# Altium PCB PCB1.PcbDoc
Units mm, origin at the board's own origin, x right, y up, seen from the top; angles counter-clockwise.
Board outline 100.25 x 100.2 mm, 2 copper layers (Top Layer, Bottom Layer); 47 components, 53 nets, 179 pads, 20 vias.
Unrouted connection lines stored in the file: 2.
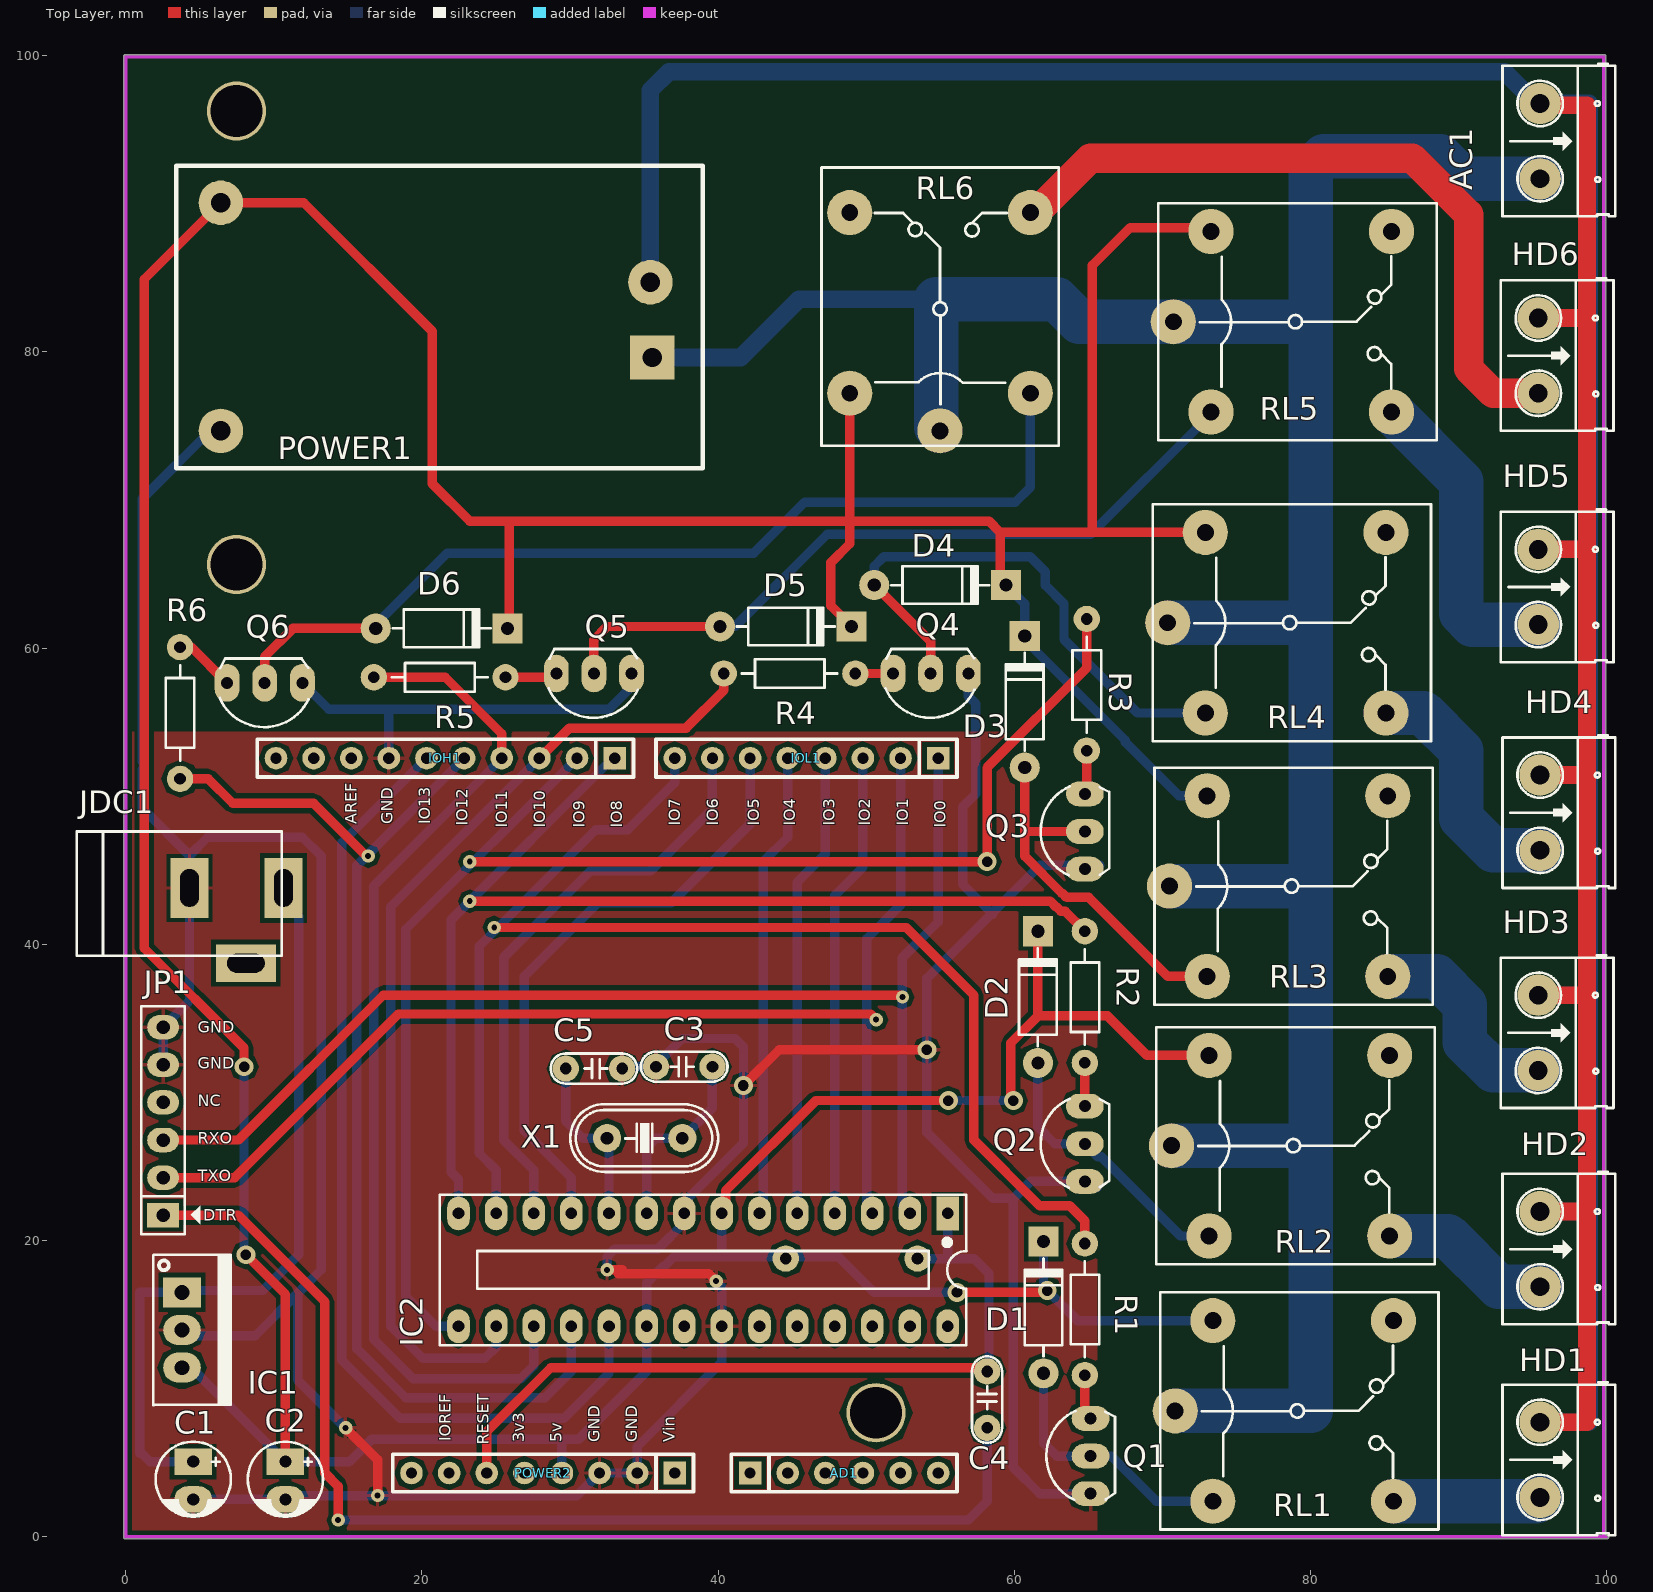
[diagram p0: Top Layer view]
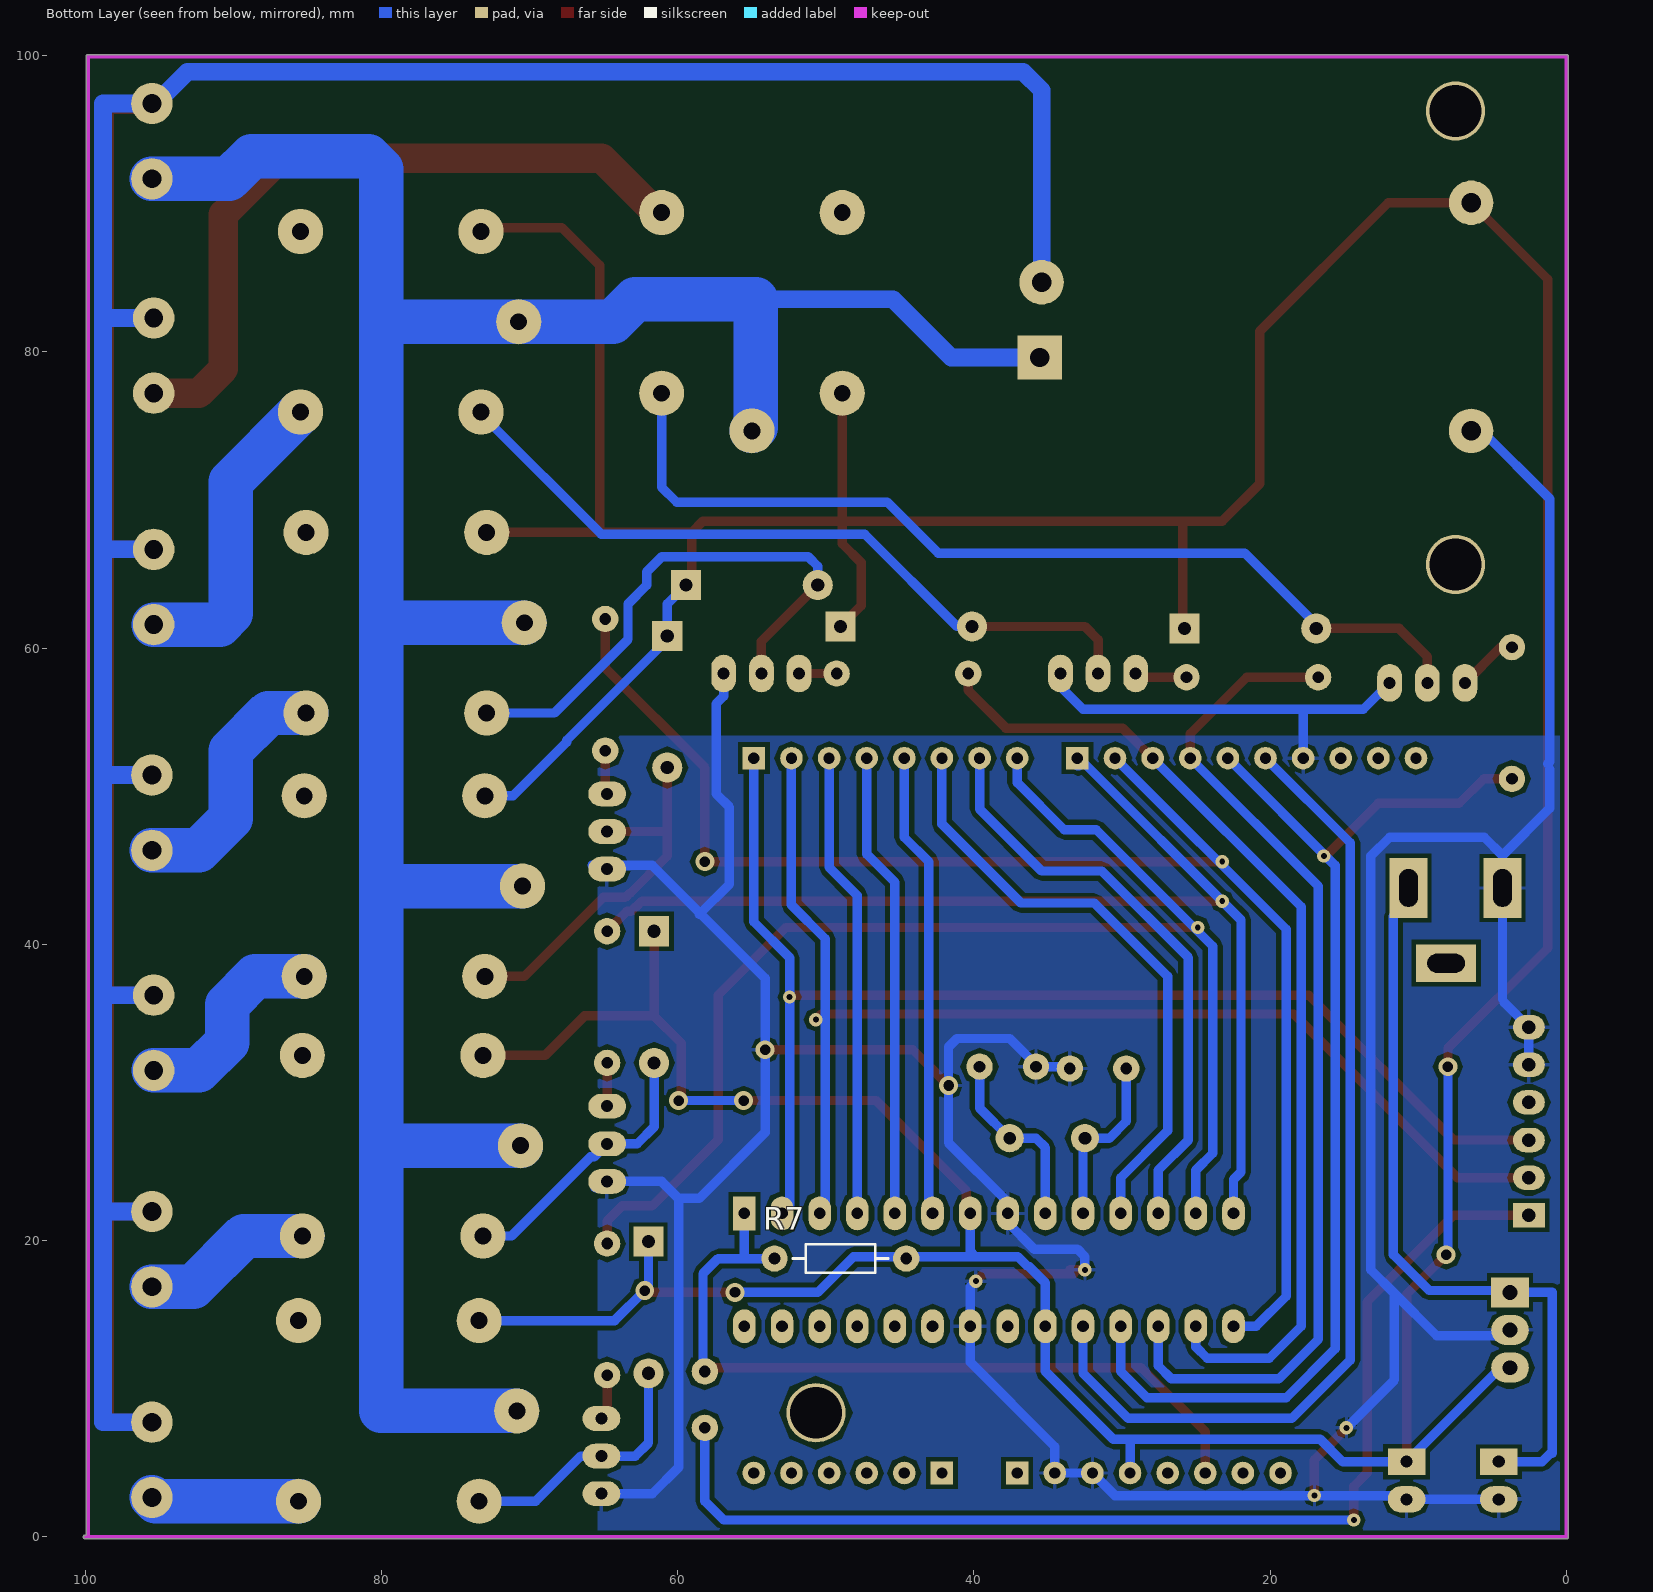
[diagram p1: Bottom Layer view, seen from below]
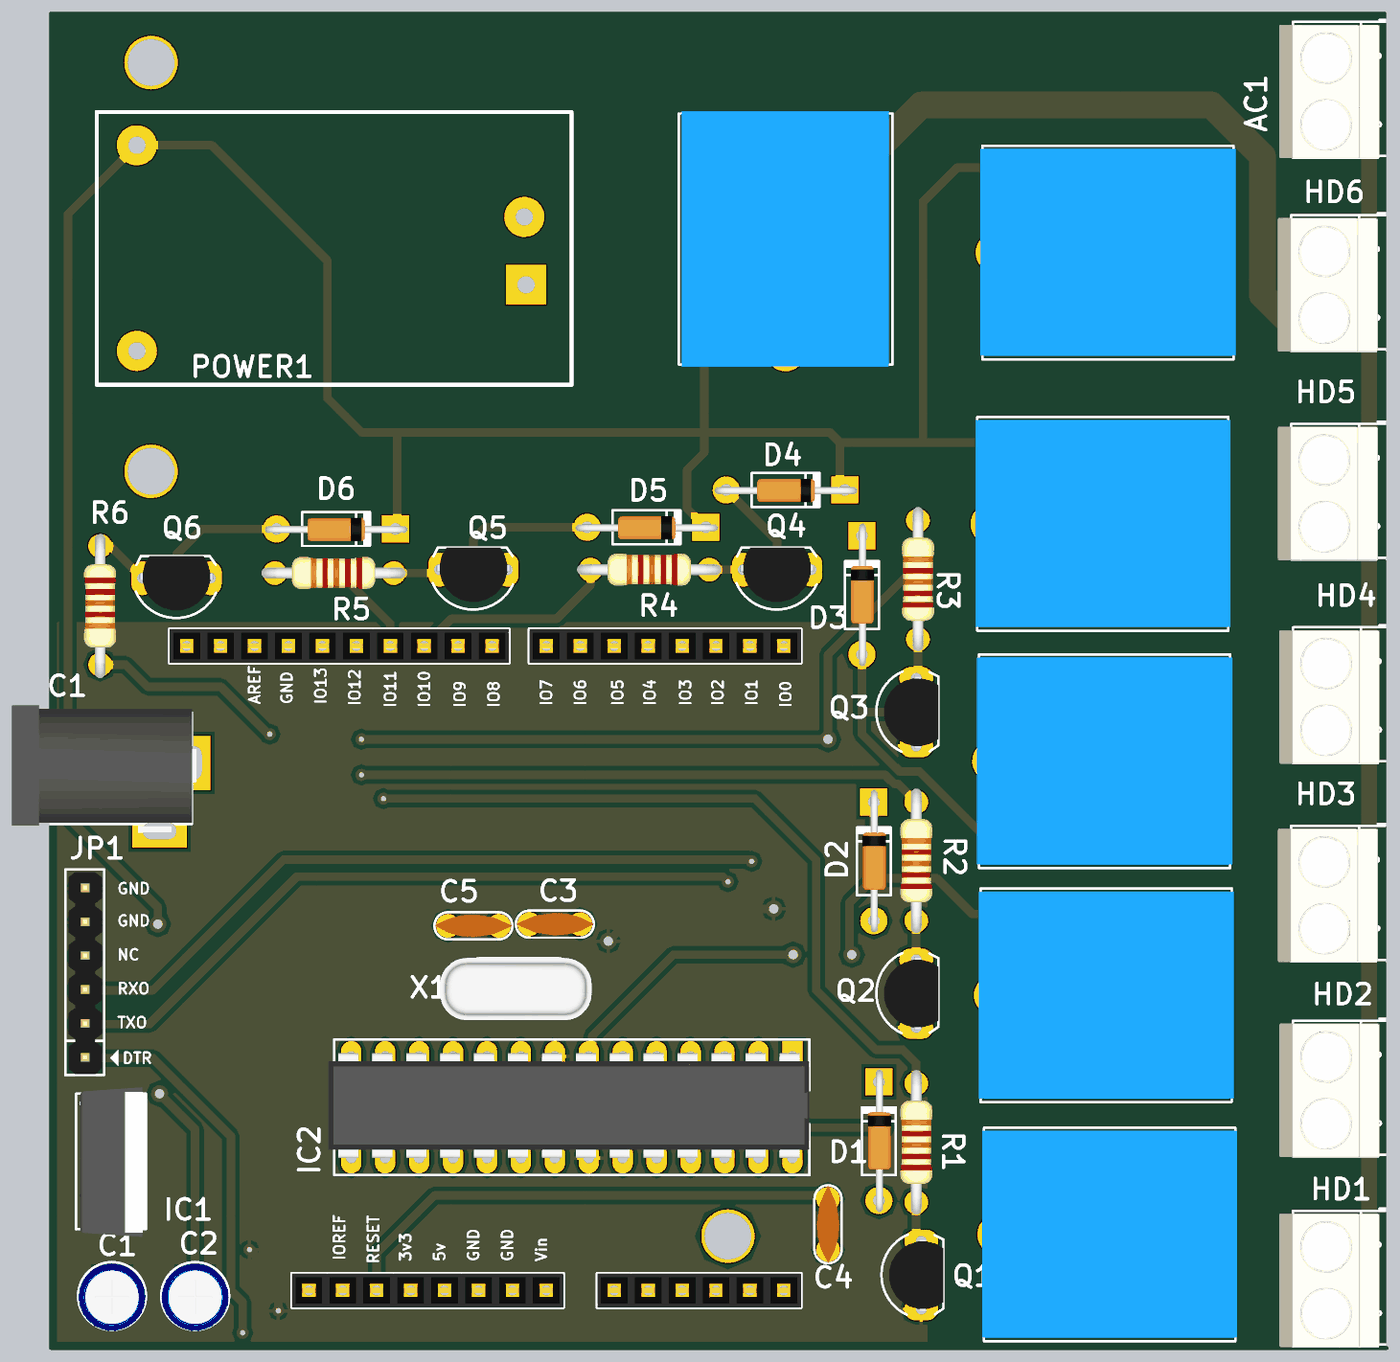
[diagram p2: 3D render of the assembled board from above, using the file's embedded part models]

## Layer stack, top to bottom
Top Solder: solder mask 0.0102, Solder Resist, Dk 3.5
Top Layer: signal copper 0.0356
Dielectric 1: dielectric 0.32, FR-4, Dk 4.8
Bottom Layer: signal copper 0.0356
Bottom Solder: solder mask 0.0102, Solder Resist, Dk 3.5

## Board outline
0,-0.127 cw(c0,0) -0.127,0 -0.127,99.949 cw(c0,99.949) 0,100.076 99.822,100.076 cw(c99.822,99.949) 99.949,99.949 99.949,0.127 100,0.127 cw(c100,0) 100.127,0 cw(c100,0) 100,-0.127

## Design rules (kind name [scope] priority, off if disabled: settings)
Clearance [All] p1: gap=0.3
PolygonConnect [All] p1: connectstyle=Relief reliefconductorwidth=0.254 reliefentries=4 polygonreliefangle="90 Angle" airgapwidth=0.254
RoutingVias [All] p1: holewidth=0.711 width=1.27 viastyle="Through Hole" minholewidth=0.711 minwidth=1.27 maxholewidth=0.711 maxwidth=1.27
SolderMaskExpansion [All] p1: expansion=0.102
Width [All] p1: maxlimit=3 minlimit=0.635 preferedwidth=0.762
30 further rules are at their usual default settings.

## Components (designator, comment, footprint, x,y, rotation, side; value= is the part's Value field where it differs from the comment)
AC1 "Header 2_1" HED2 95.504,96.774 r270 top
AD1 "AD" "Header 6x1 8.5mm" 42.164,4.318 r0 top locked
C1 "10uF" CP1/2 4.572,5.08 r270 top
C2 "100uF" CP1/2 10.795,5.08 r270 top
C3 "22p" CN1.5 35.814,31.75 r0 top
C4 "103" CN1.5 58.166,11.176 r270 top
C5 "22p" CN1.5 33.528,31.623 r180 top
D1 "1N4007" D1A 61.976,11.049 r270 top
D2 "1N4007" D1A 61.595,32.004 r270 top
D3 "1N4007" D1A 60.706,51.943 r270 top
D4 "1N4007" D1A 50.546,64.262 r180 top
D5 "1N4007" D1A 40.132,61.468 r180 top
D6 "1N4007" D1A 16.891,61.341 r180 top
HD1 "Header 2" HED2 95.504,7.747 r270 top
HD2 "Header 2" HED2 95.504,21.971 r270 top
HD3 "Header 2" HED2 95.377,36.576 r270 top
HD4 "Header 2" HED2 95.504,51.435 r270 top
HD5 "Header 2" HED2 95.377,66.675 r270 top
HD6 "Header 2" HED2 95.377,82.296 r270 top
IC1 "LM7805" QTO-220 3.81,16.51 r270 top
IC2 "ATmega8-L" DIP28/W0.3 55.499,21.844 r180 top
IOH1 "IOH" "Header 10x1 8.5mm" 33.02,52.578 r180 top locked
IOL1 "IOL" "Header 8x1 8.5mm" 54.864,52.578 r180 top locked
JDC1 "Jac DC" DC-IN 7.493,41.275 r0 top
JP1 "JP6 PIN" JP6 2.54,21.717 r90 top
POWER1 "HLK-PM01 5V" "HK LINK" 35.433,74.676 r180 top
POWER2 "POWER_UNO" "Header 8x1 8.5mm" 37.084,4.318 r180 top
Q1 "C1815" QTO-92 65.151,5.461 r90 top
Q2 "C1815" QTO-92 64.77,26.543 r90 top
Q3 "C1815" QTO-92 64.77,47.625 r90 top
Q4 "C1815" QTO-92 54.356,58.293 r180 top
Q5 "C1815" QTO-92 31.623,58.293 r180 top
Q6 "C1815" QTO-92 9.398,57.658 r180 top
R1 "1.5k" R1/4W 64.77,19.812 r270 top
R2 "1.5k" R1/4W 64.77,40.894 r270 top
R3 "1.5k" R1/4W 64.897,61.976 r270 top
R4 "1.5k" R1/4W 40.386,58.293 r0 top
R5 "1.5k" R1/4W 16.764,58.039 r0 top
R6 "1.5k" R1/4W 3.683,51.181 r90 top
R7 "1.5k" R1/4W 53.467,18.796 r180 bottom
RL1 "Relay 10A/12V" RL_SPDT_10A 70.866,8.509 r0 top
RL2 "Relay 10A/12V" RL_SPDT_10A 70.612,26.416 r0 top
RL3 "Relay 10A/12V" RL_SPDT_10A 70.485,43.942 r0 top
RL4 "Relay 10A/12V" RL_SPDT_10A 70.358,61.722 r0 top
RL5 "Relay 10A/12V" RL_SPDT_10A 70.739,82.042 r0 top
RL6 "Relay 10A/12V" RL_SPDT_10A 54.991,74.676 r90 top
X1 "16Mhz" XT2 35.052,26.924 r0 top

## Footprints (in the part's own frame and the unit in brackets; to place one, negate y for a bottom-side part, rotate by r counter-clockwise, add the part's x,y. Pads: shape width x height; smd on the part's side, far side on the other; paste and mask are expansions set on the pad)
CN1.5 [mil]
  round 70 hole 31: 1(0,0) 2(150,0)
  silkscreen extent -40,-40 190,40, body extent -40,-33 190,33, height 235
CP1/2 [mil] "Tu hoa < 22uF/16>50V"
  rect 70x100 hole 32: 1(0,0)
  oval 70x100 hole 32: 2(100,0)
  silkscreen extent -53,-100 146,100, body extent -49,-99 149,99, height 287
D1A [mil] "Diode 1A, W 100mil, L 350mil"
  round 80 hole 35: 1(0,0)
  rect 80x80 hole 35: 2(-350,0)
  silkscreen extent -305,-50 -45,50, body extent -386,-33 34,36, height 84
DC-IN [mil] "Jac DC input"
  rect 100x160 hole 50 slot 100 at 90 deg: 1(125,100) 2(-125,100)
  rect 160x100 hole 50 slot 100 at 0 deg: 3(25,-100)
  silkscreen extent -425,-80 120,250, body extent -410,-105 134,269, height 434
DIP28/W0.3 [mil] "28 PIN, W 300mil, Pin to pin 100mil"
  rect 60x90 hole 31: 1(0,0)
  oval 60x90 hole 31: 2(100,0) 3(200,0) 4(300,0) 5(400,0) 6(500,0) 7(600,0) 8(700,0) 9(800,0) 10(900,0) 11(1000,0) 12(1100,0) 13(1200,0) 14(1300,0) 15(1300,300) 16(1200,300) 17(1100,300) 18(1000,300) 19(900,300) 20(800,300) 21(700,300) 22(600,300) 23(500,300) 24(400,300) 25(300,300) 26(200,300) 27(100,300) 28(0,300)
  silkscreen extent -50,-50 1350,350, body extent -50,-10 1367,300, height 200
"Header 6x1 8.5mm" [mil] "Stackable 6 pin header"
  rect 60x60 hole 30: 1(0,0)
  round 60 hole 30: 2(100,0) 3(200,0) 4(300,0) 5(400,0) 6(500,0)
  silkscreen extent -50,-50 550,50, body extent -50,-50 550,50, height 335
"Header 8x1 8.5mm" [mil] "Stackable 8 pin header"
  rect 60x60 hole 30: 1(0,0)
  round 60 hole 30: 2(100,0) 3(200,0) 4(300,0) 5(400,0) 6(500,0) 7(600,0) 8(700,0)
  silkscreen extent -50,-50 750,50, body extent -50,-50 750,50, height 335
"Header 10x1 8.5mm" [mil] "Stackable 10 pin header"
  rect 60x60 hole 30: 1(0,0)
  round 60 hole 30: 2(100,0) 3(200,0) 4(300,0) 5(400,0) 6(500,0) 7(600,0) 8(700,0) 9(800,0) 10(900,0)
  silkscreen extent -50,-50 950,50, body extent -50,-50 950,50, height 335
HED2 [mil] "Header 2, 2 pin, hight 300mil, Pin to Pin 200, Colour Green"
  round 110 hole 50: 1(0,0) 2(200,0)
  silkscreen extent -106,-100 300,200, body extent -92,-140 302,155, height 394
"HK LINK" [mm]
  rect 3x3 hole 1.3: 1(-0.127,-4.953)
  round 3 hole 1.3: 2(0,-10.033) 3(29,0) 4(29,-15.4)
  silkscreen extent -3.53,-17.89 32,2.54, body extent -3.81,-18.03 31.88,2.41, height 15
JP6 [mil] "JP6"
  rect 65x85 hole 36: 1(0,0)
  oval 65x85 hole 36: 2(100,0) 3(200,0) 4(300,0) 5(400,0) 6(500,0)
  silkscreen extent -50,-99 556,58, body extent -48,-50 548,48, height 323
QTO-92 [mil] "TO-92"
  oval 66x100 hole 32: 1(-100,0) 2(0,0) 3(100,0)
  silkscreen extent -117,-65 120,118, body extent -109,-66 109,95, height 245
QTO-220 [mil] "TO-220 - 1-2-3"
  rect 80x100 hole 39: 1(0,0)
  oval 80x100 hole 39: 2(100,0) 3(200,0)
  silkscreen extent -100,-76 300,130, body extent -119,-64 322,121, height 755
R1/4W [mil] "R 1/4W, 2 Pin, 350mil"
  round 70 hole 31: 1(0,0) 2(350,0)
  silkscreen extent 48,-38 302,38, body extent -40,-47 386,47, height 111
RL_SPDT_10A [mil] "Relay SPDT, 5 pin, 10A,W 650mil, L 800mil, H 800mil"
  round 120 hole 45: 1(0,0) 2(580,240) 3(580,-240) 4(100,-240) 5(100,240)
  silkscreen extent -40,-315 700,315, body extent -46,-304 706,306, height 602
XT2 [mil] "Footpin for Crystal 2 pin"
  round 75 hole 34: 1(-100,0) 2(100,0)
  silkscreen extent -198,-90 195,90, body extent -233,-93 213,90, height 138

## Part data
AC1: "Header, 2-Pin"
C1 C2: library part CP1, "Cap P  0,1uF < 22uF , 16 - 50V"
C3 C4 C5: library part CN1.5, "Cap np 682pF => 104pF"
D1 D2 D3 D4 D5 D6: library part D1A, "Diode 1A"
HD1 HD2 HD3 HD4 HD5 HD6: library part Hed2, "Header 2 (Green)"
IC1: library part LM78xx, "On ap +, from + 5 to + 24VDC"
IC2: "8-Bit AVR Microcontroller with 8K Bytes of In-System Programmable Flash Memory"
JDC1: library part DCIN, "Jac DC input"
JP1: library part JP6
POWER1: library part "Hi link", "Hi-link HLK-PM01"
Q1 Q2 Q3 Q4 Q5 Q6: "NPN 600mW, ECB"
R1 R2 R3 R4 R5 R6 R7: library part R, "Resistor 1/4W"
RL1 RL2 RL3 RL4 RL5 RL6: library part "Relay 1", "Relay SPDT,10A - 12VDC 5 Pin"
X1: library part XT2, "Crystal For all Crystal 2pin."

## Free pads (board coordinates)
  round 4 hole 3.5: 0(50.673,8.382) 1(7.493,96.266) 2(7.493,65.659)

## Via types
v1: diameter 0.9, hole 0.4, Top Layer to Bottom Layer, tented both sides, 11 vias
v2: diameter 1.27, hole 0.711, Top Layer to Bottom Layer, tented both sides, 9 vias

## Nets (pads, with @x,y where several pads share a name; then routed paths per layer and width w, separated by ;. In a path a pad name is that pad's centre, name@x,y a point inside that pad or via, vN(x,y) a via of type N, cw(c..) or ccw(c..) an arc to the next point about the centre after c; other vN are vias at no path point)
3V3: POWER2.5
5V: C2.1 D1.2 D2.2 D3.2 D4.2 D5.2 D6.2 IC1.3 IC2.7 IC2.20 POWER1.4 POWER2.4 R7.2 RL1.5 RL2.5 RL3.5 RL4.5 RL5.5 RL6.5 | length 389.3
  Top Layer w0.635: v2(8.001,31.75) 8.001,33.02 1.27,39.751 1.27,84.913 POWER1.4 12.032,90.076 20.701,81.407 20.701,71.12 23.241,68.58 25.908,68.58 ; v2(8.128,19.05) 10.795,16.383 C2.1 ; D6.2 25.908,61.468 25.908,68.58 ; IC2.7 40.513,22.098 40.513,23.368 46.609,29.464 v2(55.554,29.464) ; RL6.5 48.895,68.58 ; D5.2 47.625,62.865 47.625,65.786 48.895,67.056 48.895,68.58 ; v2(56.134,16.51) 62.103,16.51 v2(62.23,16.637) ; D4.2 59.055,64.643 59.055,67.818 ; v2(59.944,29.464) 59.762,29.646 59.762,33.346 61.595,35.179 ; D2.2 61.595,35.179 ; RL4.5 65.278,67.818 ; RL5.5@73.025,88.392 67.818,88.392 65.278,85.852 65.278,67.818 ; RL2.5 68.961,32.512 66.294,35.179 61.595,35.179 ; 25.908,68.58 41.529,68.58 48.895,68.58 ; 48.895,68.58 58.293,68.58 59.055,67.818 ; 59.055,67.818 65.278,67.818
  Bottom Layer w0.635: IC1.3 4.445,11.43 C2.1 15.113,5.08 16.637,6.604 30.607,6.604 35.179,11.176 IC2.20 35.179,17.145 36.33,18.296 36.411,18.296 37.038,18.923 39.878,18.923 ; v2(8.001,31.75) 8.001,19.177 v2(8.128,19.05) ; POWER2.4 29.464,6.604 ; IC2.7 40.259,19.304 39.878,18.923 ; v2(55.554,29.464) v2(59.944,29.464) ; v2(56.134,16.51) 50.546,16.51 48.133,18.923 39.878,18.923 ; D4.2 60.706,62.992 D3.2 ; D3.2@60.579,60.706 67.492,53.793 67.492,53.666 71.12,50.038 RL3.5 ; D2.2@61.595,40.513 D2.2 ; v2@61.976,16.637 D1.2 ; v2(62.23,16.637) 64.262,14.605 RL1.5
ACL: AC1.2 HD1.1 HD2.1 HD3.1 HD4.1 HD5.1 HD6.1 POWER1.2 | length 298.8
  Top Layer w1.2: HD3.1 98.414,36.576 98.668,36.83 ; HD5.1 98.541,66.675 98.668,66.802 ; HD6.1 98.668,82.296 ; HD1.1 98.668,7.747 98.668,21.844 ; HD2.1 98.541,21.971 98.668,21.844 ; HD4.1 98.541,51.435 98.668,51.562 ; 95.504,96.774 95.62,96.658 98.668,96.658 98.668,82.296 ; 98.668,21.844 98.668,36.83 ; 98.668,36.83 98.668,51.562 ; 98.668,51.562 98.668,66.802 ; 98.668,66.802 98.668,82.296
  Bottom Layer w1.2: POWER1.2 35.433,97.663 36.692,98.922 93.102,98.922 95.25,96.774 95.504,96.774 98.795,96.774 98.795,82.296 ; HD3.1 98.668,36.576 98.795,36.449 ; HD5.1 98.668,66.675 98.795,66.802 ; HD6.1 98.795,82.296 ; HD1.1 98.795,7.747 98.795,22.098 ; HD2.1 98.668,21.971 98.795,22.098 ; HD4.1 98.679,51.435 98.795,51.319 ; 98.795,22.098 98.795,36.449 ; 98.795,36.449 98.795,51.319 ; 98.795,51.319 98.795,66.802 ; 98.795,66.802 98.795,82.296
ACN: AC1.1 POWER1.1 RL1.1 RL2.1 RL3.1 RL4.1 RL5.1 RL6.1 | length 221.7
  Bottom Layer w0.635: RL1.1 71.12,8.255 80.645,8.255 80.645,26.289
  Bottom Layer w1.2: POWER1.1 41.529,79.629 45.466,83.566 54.737,83.566
  Bottom Layer w3: RL6.1 54.737,74.93 54.737,83.566 62.865,83.566 64.389,82.042 RL5.1 80.01,82.042 ; RL4.1 80.01,61.722 ; RL3.1 80.01,43.942 ; RL2.1 80.01,26.416 ; RL1.1 80.01,8.509 80.01,26.416 ; 95.504,91.694 90.297,91.694 88.773,93.218 80.899,93.218 80.01,92.329 80.01,82.042 ; 80.01,26.416 80.01,43.942 ; 80.01,43.942 80.01,61.722 ; 80.01,61.722 80.01,82.042
AD0: IC2.23
AD1: IC2.24 | length 0.5
  Bottom Layer w0.635: IC2.24@44.958,13.843 IC2.24
AD2: IC2.25 | length 0.4
  Bottom Layer w0.635: IC2.25@47.625,13.97 IC2.25
AD3: IC2.26 | length 0.5
  Bottom Layer w0.635: IC2.26@50.038,13.843 IC2.26
AD4: IC2.27 | length 0.4
  Bottom Layer w0.635: IC2.27@52.705,13.97 IC2.27
AD5: IC2.28
AREF: IOH1.8
"DC IN": C1.1 IC1.1 JDC1.1 | length 53.4
  Bottom Layer w0.635: C1.1 1.651,5.08 1.08,5.652 0.953,5.652 0.953,16.51 IC1.1 3.937,16.637 9.271,16.637 11.684,19.05 11.684,41.91 10.541,43.053 JDC1.1@10.541,45.466
DTR: C4.2 JP1.1 | length 78.2
  Top Layer w0.635: JP1.1 7.62,21.717 13.462,15.875 13.462,4.318 14.351,3.429 v1(14.351,1.143)
  Bottom Layer w0.635: v1(14.351,1.143) 56.896,1.143 58.166,2.413 C4.2@58.166,7.874
GND: C1.2 C2.2 C3.1 C5.1 IC1.2 IC2.8 IC2.22 IOH1.7 JDC1.2 JP1.5 JP1.6 POWER1.3 POWER2.2 POWER2.3 Q1.1 Q2.1 Q3.1 Q4.1 Q5.1 Q6.1 | length 319.1
  Top Layer w0.635: v1(14.859,7.366) 17.018,5.207 v1(17.018,2.794) ; v1(32.512,18.034) 33.528,18.034 33.274,17.78 39.37,17.78 v1(39.878,17.272) ; v2(41.72,30.48) 44.133,32.893 v2(54.102,32.893)
  Bottom Layer w0.635: 1.143,51.816 1.143,49.19 4.318,46.015 ; 1.27,52.197 1.143,52.324 1.143,70.104 5.715,74.676 POWER1.3 ; JP1.5 JP1.6 4.191,36.068 ; IC1.2 4.318,14.478 4.318,13.589 8.763,13.589 11.621,16.447 ; 4.318,36.322 JDC1.2 4.318,46.015 ; C1.2 C2.2 11.049,2.794 30.48,2.794 POWER2.3 POWER2.2 34.544,6.096 40.259,11.811 IC2.22 40.259,16.891 v1(39.878,17.272) ; Q6.1 13.716,55.88 17.78,55.88 IOH1.7 ; v1(14.859,7.366) 11.621,10.605 11.621,16.447 ; 16.891,55.88 32.639,55.88 34.163,57.404 Q5.1 ; v1(32.512,18.034) 32.512,18.923 33.02,19.431 35.941,19.431 37.719,21.209 IC2.8 37.719,22.606 41.72,26.607 v2(41.72,30.48) 41.72,33.084 41.148,33.655 37.592,33.655 35.687,31.75 C5.1@33.655,31.75 ; Q4.1 56.896,56.769 57.404,56.261 57.404,50.165 56.515,49.276 56.515,44.069 58.547,42.037 ; Q2.1 61.087,24.003 59.944,22.86 ; Q1.1 61.722,2.921 59.944,4.699 59.944,22.86 ; Q2.1@65.532,23.559 Q2.1@65.596,23.622 ; Q3.1@65.786,45.339 61.722,45.339 54.102,37.719 v2(54.102,32.893) 54.102,27.305 58.547,22.86 59.944,22.86 ; 4.318,46.015 5.547,47.244 11.938,47.244 13.208,45.974 13.208,18.034 11.621,16.447
IO0: IC2.2 IOL1.1 JP1.3 | length 86
  Top Layer w0.635: JP1.3 7.62,26.797 17.399,36.576 52.324,36.576 v1(52.451,36.449)
  Bottom Layer w0.635: IC2.2 52.451,22.352 52.451,39.116 54.864,41.529 IOL1.1
IO1: IC2.3 IOL1.2 JP1.2 | length 84.7
  Top Layer w0.635: JP1.2 7.366,24.257 18.415,35.306 50.292,35.306 v1(50.673,34.925)
  Bottom Layer w0.635: IC2.3 50.038,22.225 50.038,40.386 52.324,42.672 IOL1.2
IO2: IC2.4 IOL1.3 | length 31.5
  Bottom Layer w0.635: IC2.4 47.879,43.307 49.784,45.212 IOL1.3
IO3: IC2.5 IOL1.4 | length 31.5
  Bottom Layer w0.635: IC2.5 45.339,44.196 47.244,46.101 IOL1.4
IO4: IC2.6 IOL1.5 | length 31.5
  Bottom Layer w0.635: IC2.6 43.053,22.098 43.053,45.593 44.704,47.244 IOL1.5
IO5: IC2.11 IOL1.6 | length 41.3
  Bottom Layer w0.635: IC2.11 30.099,24.257 26.924,27.432 26.924,37.846 31.877,42.799 36.83,42.799 42.164,48.133 IOL1.6
IO6: IC2.12 IOL1.7 | length 39.8
  Bottom Layer w0.635: IC2.12 27.559,24.765 25.527,26.797 25.527,39.116 31.369,44.958 35.433,44.958 39.624,49.149 IOL1.7
IO7: IC2.13 IOL1.8 R1.1 | length 93.8
  Top Layer w0.635: v1(24.892,41.148) 52.705,41.148 57.277,36.576 57.277,26.797 61.727,22.347 63.759,22.347 64.77,21.336 R1.1
  Bottom Layer w0.635: IC2.13@24.638,22.225 IC2.13 25.019,24.765 23.876,25.908 23.876,39.878 31.75,47.752 33.909,47.752 37.084,50.927 IOL1.8
IO8: IC2.14 IOH1.1 R2.1 | length 78
  Top Layer w0.635: v1(23.241,42.926) 62.424,42.926 62.822,42.527 62.867,42.527 63.149,42.245 63.432,42.245 64.77,40.907 R2.1
  Bottom Layer w0.635: IC2.14 22.479,24.13 21.971,24.638 21.971,41.656 IOH1.1@32.893,52.578 ; IOH1.1@32.893,52.07 IOH1.1@33.02,52.07
IO9: IC2.15 IOH1.2 R3.1 | length 99.6
  Top Layer w0.635: v1(23.241,45.593) v2(58.166,45.593) 58.166,51.943 64.897,58.674 R3.1
  Bottom Layer w0.635: IC2.15 20.955,14.224 18.923,16.256 18.923,41.021 IOH1.2
IO10: IC2.16 IOH1.3 R4.1 | length 67.7
  Top Layer w0.635: IOH1.3 29.972,54.61 37.846,54.61 40.386,57.15 R4.1
  Bottom Layer w0.635: IC2.16 25.019,12.827 24.257,12.065 20.066,12.065 17.907,14.224 17.907,42.545 IOH1.3
IO11: IC2.17 IOH1.4 R5.1 | length 69.6
  Top Layer w0.635: R5.1 21.59,58.039 25.4,54.229 IOH1.4
  Bottom Layer w0.635: IOH1.4 16.764,43.942 16.764,13.335 19.431,10.668 26.67,10.668 27.559,11.557 IC2.17
IO12: IC2.18 IOH1.5 R6.1 | length 77.4
  Top Layer w0.635: R6.1 5.588,51.181 7.239,49.53 12.7,49.53 16.256,45.974 v1(16.383,45.974)
  Bottom Layer w0.635: IOH1.5 15.621,45.339 15.621,12.7 18.923,9.398 28.321,9.398 30.099,11.176 IC2.18
IO13: IC2.19 IOH1.6 | length 67.1
  Bottom Layer w0.635: IOH1.6 14.605,46.863 14.605,11.938 18.542,8.001 29.591,8.001 32.639,11.049 IC2.19
IOREF: POWER2.7
NetC3_2: C3.2 IC2.9 X1.2 | length 13
  Bottom Layer w0.635: IC2.9 35.179,26.289 35.814,26.924 X1.2 39.624,28.956 39.624,31.242 C3.2@40.132,31.75
NetC5_2: C5.2 IC2.10 X1.1 | length 12
  Bottom Layer w0.635: C5.2 29.718,28.067 30.861,26.924 X1.1 32.639,26.797 IC2.10
NetD1_1: D1.1 Q1.2 RL1.4 | length 17.5
  Bottom Layer w0.635: D1.1@61.976,10.795 61.976,6.35 62.865,5.461 Q1.2 66.548,5.461 69.596,2.413 RL1.4
NetD2_1: D2.1 Q2.2 RL2.4 | length 18.9
  Bottom Layer w0.635: D2.1 61.595,27.686 62.738,26.543 Q2.2 65.654,25.659 65.888,25.659 71.226,20.32 RL2.4
NetD3_1: D3.1 Q3.2 RL3.4 | length 25.7
  Top Layer w0.635: 60.706,47.625 Q3.2 ; D3.1 60.706,45.966 63.21,43.462 63.254,43.462 63.537,43.18 65.024,43.18 70.358,37.846 RL3.4
NetD4_1: D4.1 Q4.2 RL4.4 | length 37.7
  Top Layer w0.635: D4.1 54.356,60.452 Q4.2
  Bottom Layer w0.635: D4.1 50.546,65.532 51.181,66.167 61.087,66.167 62.103,65.151 62.103,64.246 63.355,62.994 63.355,60.597 68.326,55.626 RL4.4
NetD5_1: D5.1 Q5.2 RL5.4 | length 48.9
  Top Layer w0.635: Q5.2 31.623,60.579 32.512,61.468 D5.1
  Bottom Layer w0.635: 41.148,61.468 47.371,67.691 65.151,67.691 RL5.4@73.025,75.565
NetD6_1: D6.1 Q6.2 RL6.4 | length 65.2
  Top Layer w0.635: Q6.2 9.398,59.436 11.303,61.341 D6.1
  Bottom Layer w0.635: D6.1@16.383,61.087 21.717,66.421 42.418,66.421 45.847,69.85 60.071,69.85 61.087,70.866 RL6.4
NetHD1_2: HD1.2 RL1.3 | length 10
  Bottom Layer w3: RL1.3 95.25,2.413 HD1.2
NetHD2_2: HD2.2 RL2.3 | length 11.6
  Bottom Layer w3: RL2.3 89.281,20.32 92.71,16.891 HD2.2
NetHD3_2: HD3.2 RL3.3 | length 14.3
  Bottom Layer w3: RL3.3 88.519,37.846 90.424,35.941 90.424,33.401 92.329,31.496 HD3.2
NetHD4_2: HD4.2 RL4.3 | length 16.9
  Bottom Layer w3: RL4.3 87.63,55.626 90.17,53.086 90.17,48.514 92.329,46.355 HD4.2
NetHD5_2: HD5.2 RL5.3 | length 21.3
  Bottom Layer w0.635: RL5.3@85.217,76.073 RL5.3@85.471,76.073
  Bottom Layer w3: RL5.3 90.17,71.247 90.17,62.357 90.932,61.595 HD5.2
NetHD6_2: HD6.2 RL6.3 | length 48.5
  Top Layer w2: RL6.3 61.468,89.408 65.151,93.091 86.868,93.091 90.678,89.281 90.678,78.867 92.329,77.216 HD6.2
NetQ1_3: Q1.3 R1.2 | length 3.6
  Top Layer w0.635: R1.2 64.77,8.382 Q1.3
  Bottom Layer w0.635: R1.2 R1.2@65.151,10.541
NetQ2_3: Q2.3 R2.2 | length 2.9
  Top Layer w0.635: Q2.3 R2.2
NetQ3_3: Q3.3 R3.2 | length 3
  Top Layer w0.635: Q3.3 64.897,50.292 R3.2
NetQ4_3: Q4.3 R4.2 | length 2.5
  Top Layer w0.635: R4.2 Q4.3
NetQ5_3: Q5.3 R5.2 | length 3.9
  Top Layer w0.635: R5.2 28.829,58.039 Q5.3
  Bottom Layer w0.635: Q5.3@28.829,58.039 Q5.3
NetQ6_3: Q6.3 R6.2 | length 4.2
  Top Layer w0.635: R6.2 4.445,60.071 Q6.3
RESET: C4.1 IC2.1 POWER2.6 R7.1 | length 52.9
  Top Layer w0.635: POWER2.6 24.384,7.112 28.702,11.43 57.912,11.43 C4.1
  Bottom Layer w0.635: R7.1 55.499,18.796 ; IC2.1 55.499,18.796 ; C4.1@58.293,11.684 58.293,17.78 57.277,18.796 55.499,18.796
SCL: IOH1.10
SDA: IOH1.9
VIN: POWER2.1
pads on no net: AD1.1 AD1.2 AD1.3 AD1.4 AD1.5 AD1.6 IC2.21 JDC1.3 JP1.4 POWER2.8 RL1.2 RL2.2 RL3.2 RL4.2 RL5.2 RL6.2

## Polygon pours and split planes (outlines as drawn)
GND on Top Layer "Bottom Layer-No Net" (solid, remove dead copper, pour order 4): 0.075,54.102 0.329,54.356 65.607,54.356 65.607,0.127 65.48,0.254 0.202,0.254 0.202,0.762
GND on Bottom Layer "Bottom Layer-No Net" (solid, remove dead copper, pour order 3): -0.127,53.848 0.127,54.102 65.405,54.102 65.405,-0.127 65.278,0 0,0 0,0.508

## Keep-outs
Keep-Out Layer:
  lines w0.254: 99.822,0 99.822,99.949 0,99.949 0,0.508 0,0 100,0

## Silkscreen, mask and mechanical layers (free items; w line width, h text height)
Top Overlay:
  text "AREF" at 15.621,48.133 h0.8 r90
  text "GND" at 18.034,48.133 h0.8 r90
  text "IO13" at 20.574,48.133 h0.8 r90
  text "IO12" at 23.114,48.006 h0.8 r90
  text "IO7" at 37.465,48.006 h0.8 r90
  text "IO6" at 40.005,48.006 h0.8 r90
  text "IO5" at 42.799,48.006 h0.8 r90
  text "IO4" at 45.212,48.006 h0.8 r90
  text "IO3" at 47.879,48.006 h0.8 r90
  text "IO2" at 50.292,48.006 h0.8 r90
  text "IO1" at 52.832,48.006 h0.8 r90
  text "IO11" at 25.781,47.879 h0.8 r90
  text "IO10" at 28.321,47.879 h0.8 r90
  text "IO9" at 30.988,47.879 h0.8 r90
  text "IO8" at 33.528,47.879 h0.8 r90
  text "IO0" at 55.372,47.879 h0.8 r90
  text "GND" at 4.879,34.036 h0.8
  text "GND" at 4.879,31.623 h0.8
  text "NC" at 4.879,29.083 h0.8
  text "RXO" at 4.879,26.543 h0.8
  text "TXO" at 4.879,24.003 h0.8
  text "DTR" at 5.26,21.336 h0.8
  text "IOREF" at 21.971,6.477 h0.8 r90
  text "3v3" at 26.924,6.403 h0.8 r90
  text "5v" at 29.464,6.403 h0.8 r90
  text "GND" at 32.004,6.403 h0.8 r90
  text "GND" at 34.544,6.403 h0.8 r90
  text "Vin" at 37.084,6.403 h0.8 r90
  text "RESET" at 24.511,6.223 h0.8 r90